# Altium PCB PCB_Main.PcbDoc
Units mil, origin at the board's own origin, x right, y up, seen from the top; angles counter-clockwise.
Board outline 1735 x 2304 mil, 2 copper layers (Top Layer, Bottom Layer); 26 components, 35 nets, 102 pads, 10 vias.
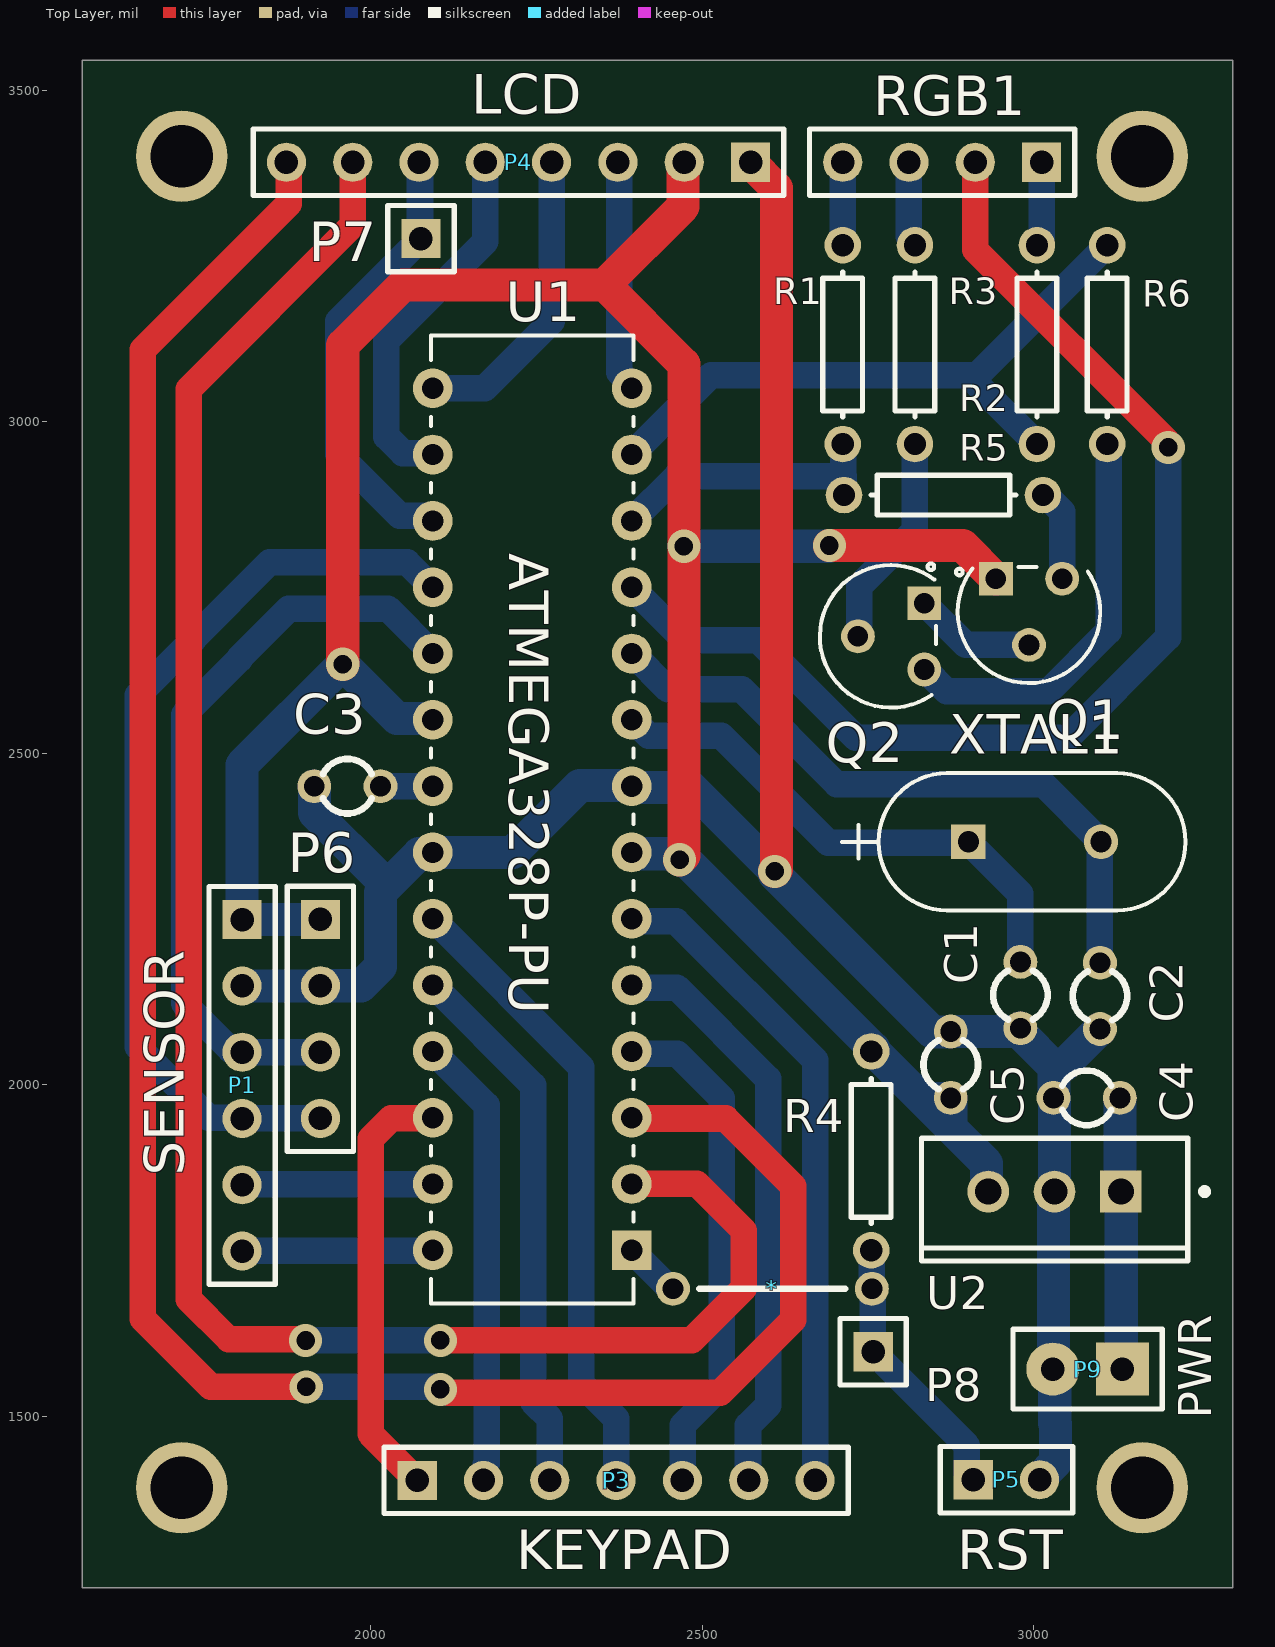
[diagram p0: Top Layer view]
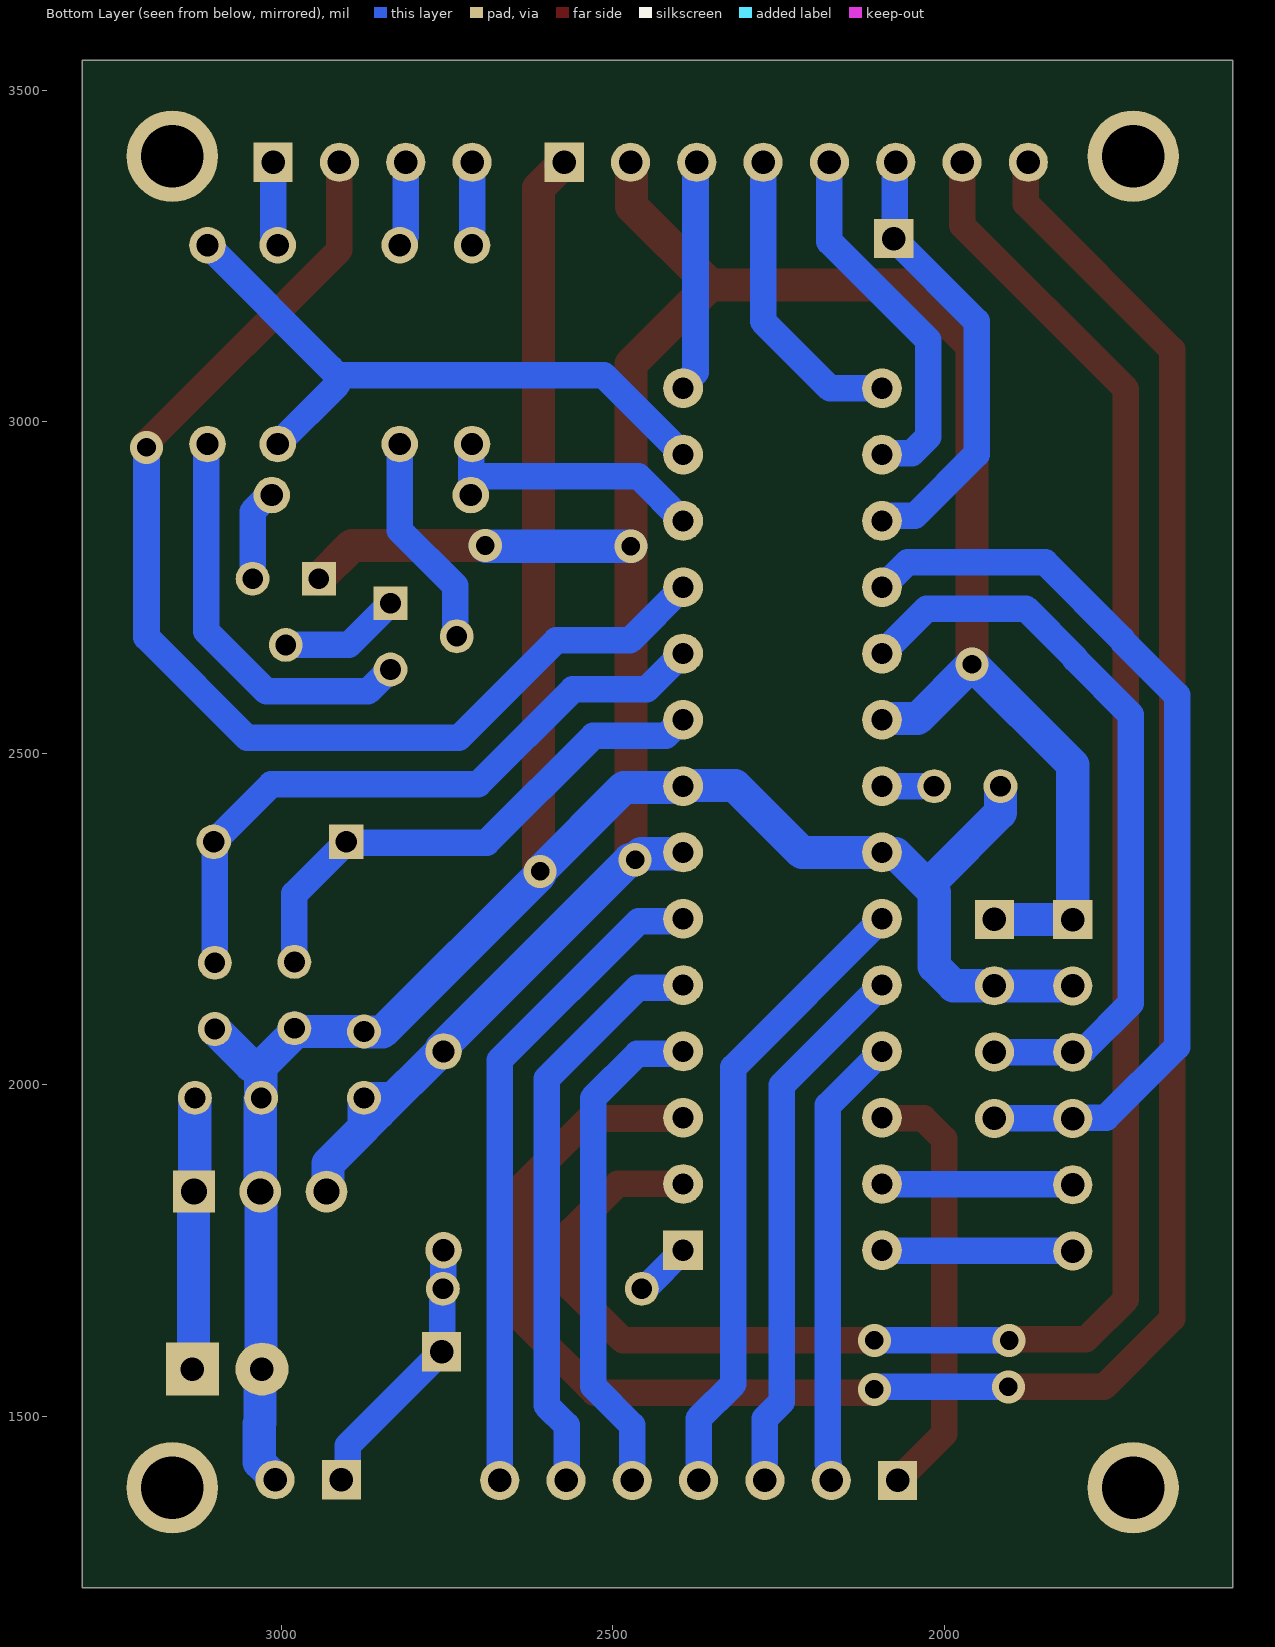
[diagram p1: Bottom Layer view, seen from below]
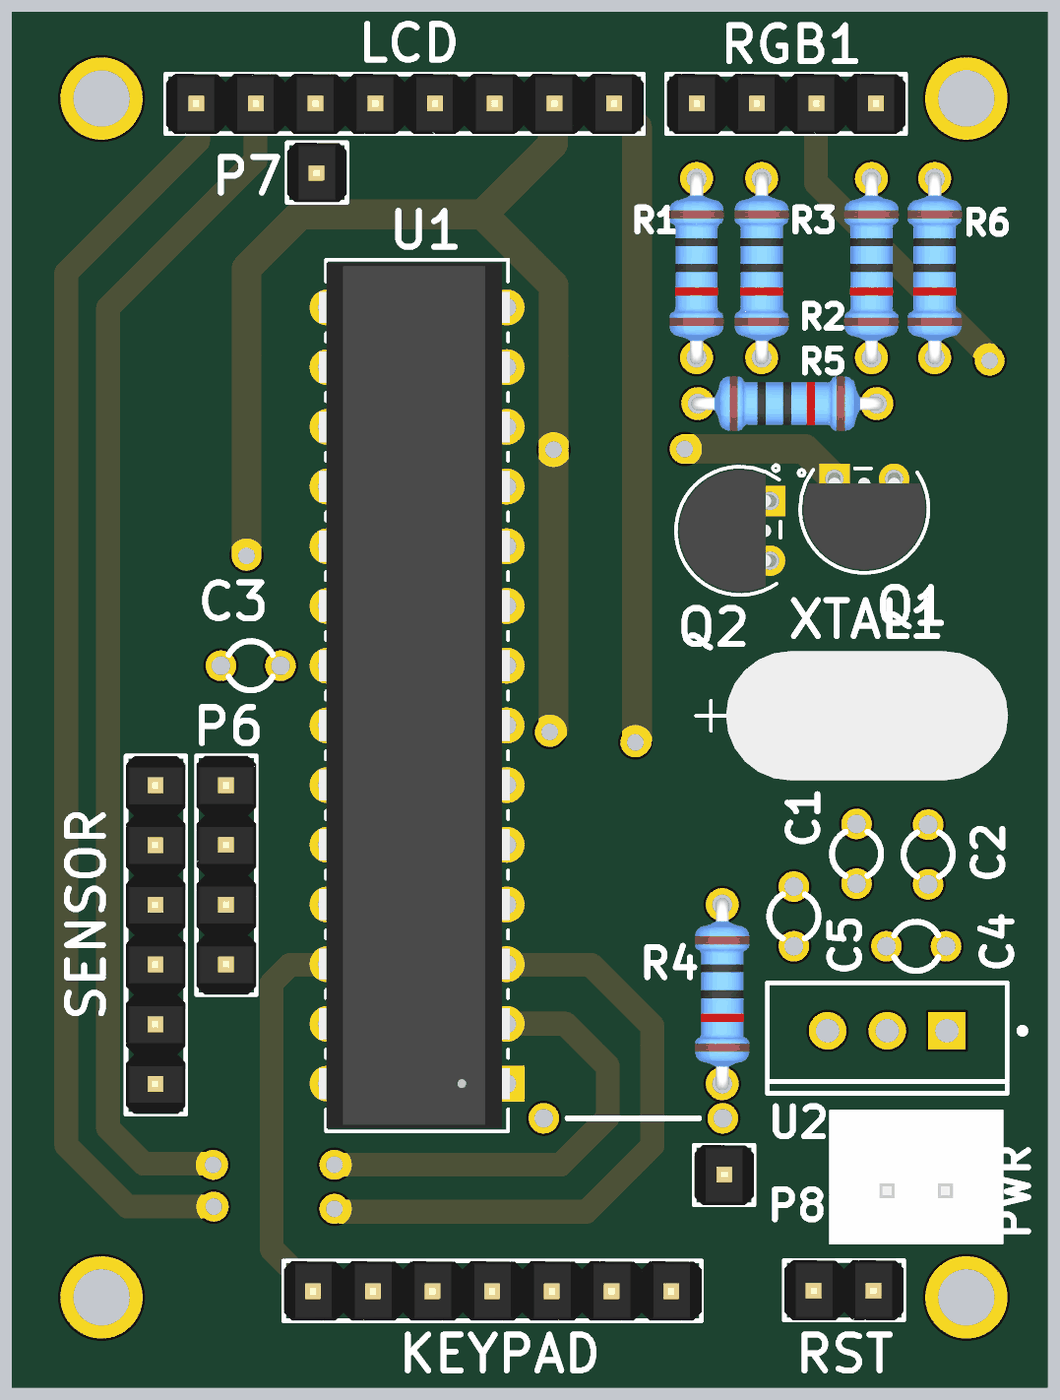
[diagram p2: 3D render of the assembled board from above, using the file's embedded part models]

## Layer stack, top to bottom
Top Solder: solder mask 0.4, Solder Resist, Dk 3.5
Top Layer: signal copper 1.4
Dielectric 1: dielectric 12.6, FR-4, Dk 4.8
Bottom Layer: signal copper 1.4
Bottom Solder: solder mask 0.4, Solder Resist, Dk 3.5

## Board outline
1565,1241 3300,1241 3300,3545 1565,3545

## Design rules (kind name [scope] priority, off if disabled: settings)
Clearance [All] p1: gap=10 ignorepadtopadclearanceinfootprint=FALSE except(0: Arc-Hole Track-Hole SMDPad-Hole THPad-Hole Via-Hole Fill-Hole Poly-Hole Region-Hole Text-Hole; 30: Arc-Arc Arc-Track Arc-Fill Arc-Poly Arc-Region Track-Track Track-Fill Track-Poly Track-Region)
PolygonConnect [All] p1: connectstyle=Relief reliefconductorwidth=10 reliefentries=4 polygonreliefangle="90 Angle" airgapwidth=10
RoutingVias [All] p1: holewidth=28 width=50 viastyle="Through Hole" minholewidth=28 minwidth=50 maxholewidth=28 maxwidth=50
SilkToSolderMaskClearance [IsText] p1: minsilkscreentomaskgap=10 clearancetoexposedcopper=TRUE
SolderMaskExpansion [All] p1: expansion=4 istentingtop=FALSE
Width Width_POW [InNet('+5')  or InNet('GND') or InNet('VS+')] p1: maxlimit=60 minlimit=30 preferedwidth=50 minimp=50.000000 maximp=50.000000 favimp=50.000000
Width [All] p2: maxlimit=60 minlimit=30 preferedwidth=40 minimp=50.000000 maximp=50.000000 favimp=50.000000
29 further rules are at their usual default settings.

## Classes and differential pairs
component class Sheet_Main: C1 C2 C3 C4 C5 P1 P3 P4 P5 P6 P7 P8 P9 Q1 Q2 R1 R3 R4 R5 R6 RGB1 U1 U2 XTAL1

## Components (designator, comment, footprint, x,y, rotation, side; value= is the part's Value field where it differs from the comment)
* "Jumper3" JUMPER3 2606,1692 r180 top
C1 "100pF" CAP3 2980,2135 r270 top
C2 "100pF" CAP3 3100,2133.74 r270 top
C3 "100pF" CAP3 1965,2450 r0 top
C4 "100pF" CAP3 3080,1980 r180 top
C5 "100pF" CAP3 2875,2030 r90 top
P1 "SENSOR" H6 1806.1,2248.82 r270 top
P3 "KEYPAD" H7 2070.28,1402.91 r0 top
P4 "LCD" H8 2573,3391 r180 top
P5 "RST" H2 2909,1404 r0 top
P6 "ISP1" H4 1924.21,2249.02 r270 top
P7 "ISP2" H1 2076,3276 r0 top
P8 "ISP3" H1 2758,1597 r180 top
P9 "PWR" H2_PWR 3133.86,1570.87 r180 top
Q1 "A733" TO-92_ONS 3043,2763 r180 top
Q2 "A733" TO-92_ONS 2835,2626 r90 top
R1 "300R" RES 2712,3116 r90 top
R2 "100R" RES 3005,3116 r90 top
R3 "470R" RES 2821,3116 r90 top
R4 "10K" RES 2755,1900 r90 top value=10k
R5 "100k" RES 2864,2889 r180 top
R6 "100k" RES 3111,3116 r90 top
RGB1 "RGB" H4 3012,3391 r180 top
U1 "ATMEGA328P-PU" 28P3_ATM 2393.74,1750.08 r180 top
U2 "LM7805CT" FAIR-TO-220-3 3031.5,1838.58 r270 top
XTAL1 "9B-11.0592MAAJ-B" XTAL 2901.57,2366.14 r0 top

## Footprints (in the part's own frame and the unit in brackets; to place one, negate y for a bottom-side part, rotate by r counter-clockwise, add the part's x,y. Pads: shape width x height; smd on the part's side, far side on the other; paste and mask are expansions set on the pad)
28P3_ATM [mil]
  rect 60x60 hole 32 mask+0: 1(0,0)
  round 60 hole 32 mask+0: 2(0,-100) 3(0,-200) 4(0,-300) 5(0,-400) 6(0,-500) 7(0,-600) 8(0,-700) 9(0,-800) 10(0,-900) 11(0,-1000) 12(0,-1100) 13(0,-1200) 14(0,-1300) 15(300,-1300) 16(300,-1200) 17(300,-1100) 18(300,-1000) 19(300,-900) 20(300,-800) 21(300,-700) 22(300,-600) 23(300,-500) 24(300,-400) 25(300,-300) 26(300,-200) 27(300,-100) 28(300,0)
  silkscreen extent -3,-1380 303,80, body extent -5,-1375 314,75, height 205
CAP3 [mm] "THD, 2-Leads"
  round 1.3 hole 0.8: 1(-1.27,0) 2(1.27,0)
  silkscreen extent -0.94,-1.04 0.94,1.04, body extent -2.34,-1.25 2.34,1.25, height 6.16
FAIR-TO-220-3 [mm] "FM, 3-Leads, Body 10.2x4.7mm, Pitch 2.54mm"
  rect 1.6x1.6 hole 1: 1(0,2.54)
  round 1.6 hole 1: 2(0,0) 3(0,-2.54)
  silkscreen extent -2.04,-5.1 2.66,5.88, body extent -2.04,-5.1 2.66,5.1, height 18.95
H1 [mm] "Connector; Header; 1 Position"
  rect 1.5x1.5 hole 0.9: 1(0,0)
  silkscreen extent -1.27,-1.27 1.27,1.27, body extent -1.27,-1.27 1.27,1.27, height 9.2
H2 [mm] "Connector; Header; 2 Position"
  rect 1.5x1.5 hole 0.9: 1(0,0)
  round 1.5 hole 0.9: 2(2.54,0)
  silkscreen extent -1.27,-1.27 3.81,1.27, body extent -1.27,-1.27 3.81,1.27, height 9.2
H2_PWR [mil] "Connector; Header; 2 Position"
  rect 80x80 hole 35.43: 1(0,0)
  round 80 hole 35.43: 2(105,0)
  silkscreen extent -60,-60 165,60, body extent -93,-135 200,90, height 270
H4 [mm] "Connector; Header; 4 Position"
  rect 1.5x1.5 hole 0.9: 1(0,0)
  round 1.5 hole 0.9: 2(2.54,0) 3(5.08,0) 4(7.62,0)
  silkscreen extent -1.27,-1.27 8.89,1.27, body extent -1.27,-1.27 8.89,1.27, height 9.2
H6 [mm] "Connector; Header; 6 Position"
  rect 1.5x1.5 hole 0.9: 1(0,0)
  round 1.5 hole 0.9: 2(2.54,0) 3(5.08,0) 4(7.62,0) 5(10.16,0) 6(12.7,0)
  silkscreen extent -1.27,-1.27 13.97,1.27, body extent -1.27,-1.27 13.97,1.27, height 9.2
H7 [mm] "Connector; Header; 7 Position"
  rect 1.5x1.5 hole 0.9: 1(0,0)
  round 1.5 hole 0.9: 2(2.54,0) 3(5.08,0) 4(7.62,0) 5(10.16,0) 6(12.7,0) 7(15.24,0)
  silkscreen extent -1.27,-1.27 16.51,1.27, body extent -1.27,-1.27 16.51,1.27, height 9.2
H8 [mm] "Connector; Header; 8 Position"
  rect 1.5x1.5 hole 0.9: 1(0,0)
  round 1.5 hole 0.9: 2(2.54,0) 3(5.08,0) 4(7.62,0) 5(10.16,0) 6(12.7,0) 7(15.24,0) 8(17.78,0)
  silkscreen extent -1.27,-1.27 19.05,1.27, body extent -1.27,-1.27 19.05,1.27, height 9.2
JUMPER3 [mm]
  round 1.3 hole 0.8: 1(-3.81,0) 2(3.81,0)
  silkscreen extent -2.79,0 2.79,0
RES [mm] "Axial Device, Thru-Hole; 2 Leads; 0.3 in Pin Spacing"
  round 1.4 hole 0.85: 1(-3.81,0) 2(3.81,0)
  silkscreen extent -2.77,-0.76 2.77,0.76, body extent -4.08,-1.17 4.08,1.17, height 2.44
TO-92_ONS [mil]
  rect 51x51 hole 31 mask+0: 1(100,0)
  round 51 hole 31 mask+0: 2(50,100) 3(0,0)
  silkscreen extent -57,-17 160,157, body extent -52,-11 152,153, height 300
XTAL [mil] "Connector; Header; 1 Position"
  rect 52x52 hole 32 mask+0: 1(0,0)
  round 52 hole 32 mask+0: 2(200,0)
  silkscreen extent -190,-104 328,104, body extent -140,-108 332,108, height 145

## Part data
C1 C2 C3 C4 C5: library part Cap1, "Capacitor", PackageDescription="Capacitor; 2 Leads", PackageReference=CAPR5-4X5, Published=23-Sep-2002, Publisher="Altium Limited"
P1: library part "Header 6", "Header, 6-Pin", LatestRevisionDate=17-Jul-2002, LatestRevisionNote="Re-released for DXP Platform.", Publisher="Altium Limited"
P3: library part "Header 7", "Header, 7-Pin", LatestRevisionDate=17-Jul-2002, LatestRevisionNote="Re-released for DXP Platform.", Publisher="Altium Limited"
P4: library part "Header 8", "Header, 8-Pin", LatestRevisionDate=17-Jul-2002, LatestRevisionNote="Re-released for DXP Platform.", Publisher="Altium Limited"
P5 P9: library part "Header 2", "Header, 2-Pin", LatestRevisionDate=17-Jul-2002, LatestRevisionNote="Re-released for DXP Platform.", Publisher="Altium Limited"
P6: library part "Header 4", "Header, 4-Pin", LatestRevisionDate=17-Jul-2002, LatestRevisionNote="Re-released for DXP Platform.", Publisher="Altium Limited"
P7 P8: library part "Header 1", "Header, 1-Pin", LatestRevisionDate=17-Jul-2002, LatestRevisionNote="Re-released for DXP Platform.", Publisher="Altium Limited"
Q1 Q2: "PNP General Purpose Transistor", ComponentLink1Description="Manufacturer Link", ComponentLink1URL=http://www.fairchildsemi.com/, ComponentLink2Description=Datasheet, ComponentLink2URL=http://www.fairchildsemi.com/ds/2N%2F2N3906.pdf, DatasheetVersion=1997, LatestRevisionDate=15-Jan-2003, LatestRevisionNote="PCB Footprint 'BCY-W3/D4.7' replaced", PackageDescription="TO, Flat Index; 3 In-Line, Axial Leads; Body Dia. 4.5mm; Leads 0.51 x 0.48 mm (max)", PackageReference=TO-92A, PackageVersion=Sep-1998, Published=8-Jun-2000, Publisher="Altium Limited"
R1 R2 R3 R4 R5 R6: library part Res1, "Resistor", LatestRevisionDate=17-Jul-2002, LatestRevisionNote="Re-released for DXP Platform.", PackageDescription="Axial Device, Thru-Hole; 2 Leads; 0.3 in Pin Spacing", PackageReference=AXIAL-0.3, Published=8-Jun-2000, Publisher="Altium Limited"
U1 XTAL1: "No Description Available", Copyright="Copyright (C) 2018 Accelerated Designs. All rights reserved", RefDes=RefDes, Type=DEV
  U1: Built_By=EMA_UL_Team, Manufacturer_Part_Number=ATMEGA328P-PU, SourceLibrary=Atmel_2011-04-02, Vendor=Atmel
  XTAL1: Built_By=EMA_Cory, Datasheet=http://www.txccrystal.com/images/pdf/9b.pdf, Manufacturer_Part_Number=9B-11.0592MAAJ-B, SourceLibrary=TXC_2020-02-10, Vendor=TXC
U2: library part CMP-2000-04938-1, "Positive Voltage Regulator, 5 V, 1 A, -40 to 125 degC, 3-Pin TO-220, RoHS, Tube", Manufacturer=FairchildSemiconductor, Maximum Input Voltage=35V, Maximum Output Current=2.2(Typ)A, Maximum Quiescent Current=8mA, Operating Temperature=-40to125degC, Output Voltage=5V, Package=3TO-220AB, Package Description="3-Pin Through Hole Device, Body 10 x 4.5 mm, Pitch 2.54 mm", Package Reference=TO-220, Typical Dropout Voltage @ Current=2@1AV, Accuracy=±4%, Category=LinearRegulator, Datasheet URL=https://datasheet.ciiva.com/26904/lm7805ct-26904988.pdf, Datasheet Version=Aug-12, Line Regulation=100mV, Load Regulation=100mV, Manufacturer URL=https://www.fairchildsemi.com/, Mounting=ThroughHole, Number of Outputs=1, Output Type=Fixed, Package URL=https://www.fairchildsemi.com/package-drawings/TO/TO220B03.pdf, Packaging=Rail/Tube, Polarity=Positive, Rad Hard=No, Type=Linear

## Free pads (board coordinates)
  round 137.8 hole 94.49: ""(1715,1392) ""(1715,3400) ""(3164,1392) ""(3164,3400)

## Via types
v1: diameter 50, hole 28, Top Layer to Bottom Layer, 10 vias

## Nets (pads, with @x,y where several pads share a name; then routed paths per layer and width w, separated by ;. In a path a pad name is that pad's centre, name@x,y a point inside that pad or via, vN(x,y) a via of type N, cw(c..) or ccw(c..) an arc to the next point about the centre after c; other vN are vias at no path point)
+5: C5.1 P1.1 P4.2 P6.1 Q1.1 R4.2 U1.7 U1.20 U2.3 | length 4087.1
  Top Layer w50: v1(1958,2634) 1958,3115 2049,3206 2353,3206 ; v1(2466,2339) 2472.44,2345.44 v1(2472.44,2811.9) 2472.44,3086.56 2353,3206 ; P4.2 2471.27,3389.27 2471.27,3324.27 2353,3206 ; v1(2692,2813) 2893,2813 Q1.1
  Bottom Layer w50: P6.1 1924.11,2248.92 1806.2,2248.92 P1.1 1806.1,2482.1 v1(1958,2634) 2040.01,2551.99 2091.83,2551.99 U1.20 ; U1.7 2395.65,2348.17 2456.83,2348.17 v1(2466,2339) 2474.15,2339 R4.2@2759.08,2054.08 ; P4.2@2471.27,3389.27 P4.2 ; v1(2472.44,2811.9) 2690.9,2811.9 v1(2692,2813) ; R4.2 2755.98,2049.02 2760.98,2049.02 2852.5,1957.5 ; C5.1 2875,1934.99 2929.01,1880.98 2929.01,1841.07 U2.3
GND: C1.2 C2.2 C3.1 C4.2 C5.2 P1.2 P4.1 P5.2 P6.2 P9.2 U1.8 U1.22 U2.2 | length 3608.8
  Top Layer w50: P1.2 P1.2@1807.83,2150.55 ; P6.2 P6.2@1924.86,2148.37 ; P4.1 2612,3352 2612,2324.13 v1(2609.43,2321.57)
  Bottom Layer w50: P1.2 1806.2,2148.92 1924.11,2148.92 P6.2 1985.71,2149.02 2015,2178.31 2015,2290 2073.17,2348.17 2091.83,2348.17 U1.22 2214.57,2350.08 2315.49,2451 2392.82,2451 U1.8 ; C3.1 1915.23,2449.77 1915.23,2409.89 2015,2310.11 ; U1.8@2395.65,2450.87 2398.36,2448.17 2482.83,2448.17 v1(2609.43,2321.57) 2609.43,2316.86 2847.02,2079.27 2873.95,2079.27 2874.68,2080 C5.2 2974.68,2080 2979.68,2085 C1.2 2980.23,2084.77 2980.23,2077.18 3030.57,2026.83 ; P4.1 P4.1@2577.53,3386.47 ; P5.2 3009,1406.45 3033,1430.45 3033,1488.53 3031.74,1489.79 3031.74,1567.98 P9.2 3030.18,1572.18 3030.18,1837.26 U2.2 3031.5,1978.18 3030.23,1979.45 3030.23,1979.68 C4.2@3030.55,1980 ; C2.2 3099.77,2083.51 3099.77,2083.27 3045.68,2029.18 3030.57,2026.83 ; C4.2@3030.57,1980 C4.2@3030.57,1980.57 ; C4.2@3030.55,1980 C4.2 C4.2@3030.57,1980.57 ; C4.2@3030.57,1980.57 3030.57,2026.83
Net*_1: *.1 P5.1 P8.1 R4.1 | length 409.8
  Bottom Layer w40: R4.1 2755.5,1749.5 2755.5,1692.5 2757,1691 2757,1598 P8.1 2899.47,1455.53 2899.47,1413.53 P5.1
Net*_2: *.2 U1.1 | length 86.3
  Bottom Layer w40: U1.1 2449.68,1694.14 2453.86,1694.14 *.2
NetC1_1: C1.1 U1.9 XTAL1.1 | length 798.6
  Bottom Layer w40: U1.9 2395.75,2550.08 2419.83,2526 2529,2526 2690,2365 2900.43,2365 XTAL1.1 2980,2287.72 C1.1
NetC2_1: C2.1 U1.10 XTAL1.2 | length 1008.5
  Bottom Layer w40: U1.10 2394.75,2650.08 2448.82,2596 2560.01,2596 2703.01,2453 3014.72,2453 XTAL1.2 3100,2364.57 C2.1
NetC3_2: C3.2 U1.21 | length 78.8
  Bottom Layer w40: C3.2 2015.08,2450.08 U1.21
NetP1_3: P1.3 P6.3 U1.19 | length 1150.9
  Top Layer w40: P1.3 P1.3@1806.2,2048.92 ; P6.3@1915.41,2048.92 1915.51,2049.02 P6.3
  Bottom Layer w40: P6.3 1924.11,2048.92 1806.2,2048.92 P1.3 1802.46,2052.46 1788.68,2052.46 1718.62,2122.53 1718.62,2557.96 1802.28,2641.62 1802.28,2643.25 1876.75,2717.72 2026.1,2717.72 U1.19
NetP1_4: P1.4 P6.4 U1.18 | length 1404.2
  Top Layer w40: P1.4 P1.4@1806.2,1948.92 ; P6.4@1915.41,1948.92 1915.51,1949.02 P6.4
  Bottom Layer w40: P6.4 1924.11,1948.92 1806.2,1948.92 P1.4 1804.83,1950.09 1755.61,1950.09 1648.62,2057.09 1648.62,2586.95 1732.28,2670.61 1732.28,2672.24 1847.76,2787.72 2055.1,2787.72 2092.74,2750.08 U1.18
NetP1_5: P1.5 U1.27 | length 288.2
  Bottom Layer w40: P1.5 1806.73,1849.45 2084.5,1849.45 2085.13,1850.08 U1.27
NetP1_6: P1.6 U1.28 | length 288.2
  Bottom Layer w40: P1.6 1806.73,1749.45 2084.5,1749.45 2085.13,1750.08 U1.28
NetP3_1: P3.1 U1.26 | length 652
  Top Layer w40: P3.1 2000,1473.19 2000,1918 2031,1949 2092.66,1949 U1.26
  Bottom Layer w40: U1.26@2093.2,1949.54 U1.26
NetP3_2: P3.2 U1.25 | length 682.9
  Bottom Layer w40: U1.25 2175.2,1968.62 2175.2,1428.44 2173.92,1427.17 2173.92,1406.56 P3.2
NetP3_3: P3.3 U1.24 | length 820.3
  Bottom Layer w40: U1.24 2245.2,1998.62 2245.2,1521.38 2270.28,1496.3 P3.3
NetP3_4: P3.4 U1.23 | length 961.7
  Bottom Layer w40: U1.23 2317.91,2025.91 2317.91,1548.66 2370.28,1496.3 P3.4
NetP3_5: P3.5 U1.4 | length 766.2
  Bottom Layer w40: U1.4 2397.57,2046.25 2462.85,2046.25 2529.53,1979.57 2529.53,1545.28 2470.47,1486.22 2470.47,1403.11 P3.5
NetP3_6: P3.6 U1.5 | length 883.1
  Bottom Layer w40: U1.5 2397.57,2146.25 2461.84,2146.25 2599.53,2008.56 2599.53,1516.28 2569.18,1485.94 2569.18,1404.01 P3.6
NetP3_7: P3.7 U1.6 | length 998.8
  Bottom Layer w40: U1.6 2397.57,2246.25 2460.84,2246.25 2670.28,2036.81 P3.7
NetP4_3: P4.3 U1.14 | length 349.5
  Bottom Layer w40: P4.3 2375,3389 2375,3074.23 2393.74,3055.49 U1.14
NetP4_4: P4.4 U1.15 | length 461.1
  Bottom Layer w40: U1.15 2172.08,3050.08 2273,3151 P4.4
NetP4_5: P4.5 U1.16 | length 556.8
  Bottom Layer w40: U1.16 2091.51,2952.31 2048.69,2952.31 2023.74,2977.26 2023.74,3122.26 2173,3271.52 P4.5
NetP4_6: P4.6 P7.1 U1.17 | length 677.6
  Bottom Layer w40: P4.6 2074.5,3389.5 2074.5,3277.5 P7.1 1951,3151 1951,2951.01 2044.29,2857.72 2080.69,2857.72 2088.33,2850.08 U1.17
NetP4_7: P4.7 U1.2 | length 2998.1
  Top Layer w40: v1(1902,1614) 1900.09,1615.91 1786.09,1615.91 1726,1676 1726,3049 1973,3296 P4.7 ; v1(2105.2,1614.17) 2484.25,1614.17 2562.99,1692.91 2562.99,1779.53 2492.13,1850.39 U1.2@2393.74,1850.39
  Bottom Layer w40: v1(1902,1614) 1902.09,1614.09 2105.11,1614.09 v1(2105.2,1614.17) ; U1.2 U1.2@2393.9,1850.24
NetP4_8: P4.8 U1.3 | length 3398.7
  Top Layer w40: P4.8 1876.65,3387.35 1876.65,3328.65 1656,3108 1656,1647.01 1759.01,1544 v1(1903,1544) ; v1(2105.2,1540.35) 2107.11,1538.44 2114.18,1538.44 2117.19,1535.43 2527.56,1535.43 2637.8,1645.67 2637.8,1846.46 2535.43,1948.82 U1.3@2393.74,1948.82
  Bottom Layer w40: v1(1903,1544) 2098.85,1544 2102.49,1540.35 v1(2105.2,1540.35) ; U1.3 U1.3@2394.37,1949.45
NetQ1_2: Q1.2 Q2.1 | length 184.1
  Bottom Layer w40: Q2.1 2898,2663 Q1.2
NetQ1_3: Q1.3 R5.1 | length 140.6
  Bottom Layer w40: R5.1@3014.11,2888.89 R5.1 3018.09,2889 3043,2864.09 Q1.3
NetQ2_2: Q2.2 R3.1 | length 325.6
  Bottom Layer w40: Q2.2 2737.1,2678.1 2737.1,2752.04 2821,2835.93 R3.1
NetQ2_3: Q2.3 R6.1 | length 612.2
  Bottom Layer w40: Q2.3 2836.01,2626 2869.01,2593 3021.99,2593 3113,2684.01 3113,2964 R6.1
NetR1_1: R1.1 R5.2 U1.12 | length 425.2
  Bottom Layer w40: U1.12 2461.1,2917.44 2713.44,2917.44 2713.44,2889.56 R5.2 ; R1.1 2713,2965 2713,2917.44
NetR1_2: R1.2 RGB1.4 | length 125
  Bottom Layer w40: R1.2 RGB1.4
NetR2_1: R2.1 R6.2 U1.13 | length 989.4
  Bottom Layer w40: U1.13 2513.66,3070 2915,3070 ; R2.1 2915,3056 2915,3061.57 2915,3070 ; R6.2 2925.28,3080.28 2915,3070
NetR2_2: R2.2 RGB1.1 | length 127.9
  Bottom Layer w40: R2.2 3005,3270.09 3012,3277.09 RGB1.1
NetR3_2: R3.2 RGB1.3 | length 128.7
  Bottom Layer w40: RGB1.3 2812,3279.09 2821,3270.09 R3.2
NetRGB1_2: RGB1.2 U1.11 | length 1804.9
  Top Layer w40: RGB1.2 2912,3259 3201.09,2969.91 3201.09,2962.91 v1(3203,2961)
  Bottom Layer w40: U1.11 2473.82,2670 2585,2670 2732,2523 3050.99,2523 3203,2675.01 v1(3203,2961) ; RGB1.2 RGB1.2@2913.5,3389.5
VS+: C4.1 P9.1 U2.1 | length 410.7
  Bottom Layer w50: C4.1 3130.23,1979.77 3130.23,1839.85 3132.03,1838.05 3132.03,1585.87 3133.86,1584.04 P9.1

## Other copper
Bottom Layer:
  region net +5: 2868.89,1990 2868.89,2004.14 2830,2004.14 2830,1990
  region net +5: 2860,1915 2870,1925 2842.5,1952.5 2832.5,1942.5

## Text inside footprints (layer, text, board x,y; h text height)
Q1: Mechanical 7 "Pinout: 1, 2, 3" at 3180.5,2998.5 h50 r180; Mechanical 7 "Default Padstyle: EX51Y51D31P" at 3355.5,3058.5 h50 r180; Mechanical 7 "Pin 1 Padstyle: SX51Y51D31P" at 3330.5,3118.5 h50 r180; Mechanical 7 "Alt 1 Padstyle: OX60Y90D30P" at 3330.5,3178.5 h50 r180; Mechanical 7 "Alt 2 Padstyle: OX90Y60D30P" at 3330.5,3238.5 h50 r180; Mechanical 7 "0.205in/5.207mm" at 3086.75,2540.5 h25 r180; Mechanical 7 "0.1in/2.54mm" at 2820.5,2725.5 h25 r180; Mechanical 7 "0.1in/2.54mm" at 3068,2900.75 h25 r180; Mechanical 7 "0.165in/4.191mm" at 3353,2725.5 h25 r180
Q2: Mechanical 7 "Pinout: 1, 2, 3" at 3070.5,2488.5 h50 r90; Mechanical 7 "Default Padstyle: EX51Y51D31P" at 3130.5,2313.5 h50 r90; Mechanical 7 "Pin 1 Padstyle: SX51Y51D31P" at 3190.5,2338.5 h50 r90; Mechanical 7 "Alt 1 Padstyle: OX60Y90D30P" at 3250.5,2338.5 h50 r90; Mechanical 7 "Alt 2 Padstyle: OX90Y60D30P" at 3310.5,2338.5 h50 r90; Mechanical 7 "0.205in/5.207mm" at 2612.5,2582.25 h25 r90; Mechanical 7 "0.1in/2.54mm" at 2797.5,2848.5 h25 r90; Mechanical 7 "0.1in/2.54mm" at 2972.75,2601 h25 r90; Mechanical 7 "0.165in/4.191mm" at 2797.5,2316 h25 r90
U1: Mechanical 7 "1.45in/36.83mm" at 1973.74,2412.58 h25 r180; Mechanical 7 "0.295in/7.493mm" at 2337.49,1630.08 h25 r180; Mechanical 7 "0.3in/7.62mm" at 2318.74,3195.08 h25 r180; Mechanical 7 "0.1in/2.54mm" at 2663.74,1812.58 h25 r180; Mechanical 7 "Alt 2 Padstyle: OX90Y60D30P" at 2581.24,3530.08 h50 r180; Mechanical 7 "Alt 1 Padstyle: OX60Y90D30P" at 2581.24,3480.08 h50 r180; Mechanical 7 "Pin 1 Padstyle: SX60Y60D32P" at 2581.24,3430.08 h50 r180; Mechanical 7 "Default Padstyle: EX60Y60D32P" at 2606.24,3330.08 h50 r180; Mechanical 13 "*" at 2393.74,1775.08 h50 r180
XTAL1: Mechanical 7 "Pin 1 Pad Style: SX52Y52D32P" at 2647.64,2067.64 h50; Mechanical 7 "Default Pad Style: EX52Y52D32P" at 2622.64,1992.64 h50; Mechanical 7 "Alt 1 Pad Style: OX60Y90D30P" at 2647.64,1917.64 h50; Mechanical 7 "Alt 2 Pad Style: OX90Y60D30P" at 2647.64,1842.64 h50; Mechanical 7 "0.197in/5.004mm" at 3294.14,2353.64 h25; Mechanical 7 "200mil" at 2946.57,2176.14 h25; Mechanical 7 "0.453in/11.506mm" at 2897.64,2534.64 h25